# EAGLE board power_board (EAGLE 7.6.0)
DRAWING_TITLE: power_board; REVISION: 1.0
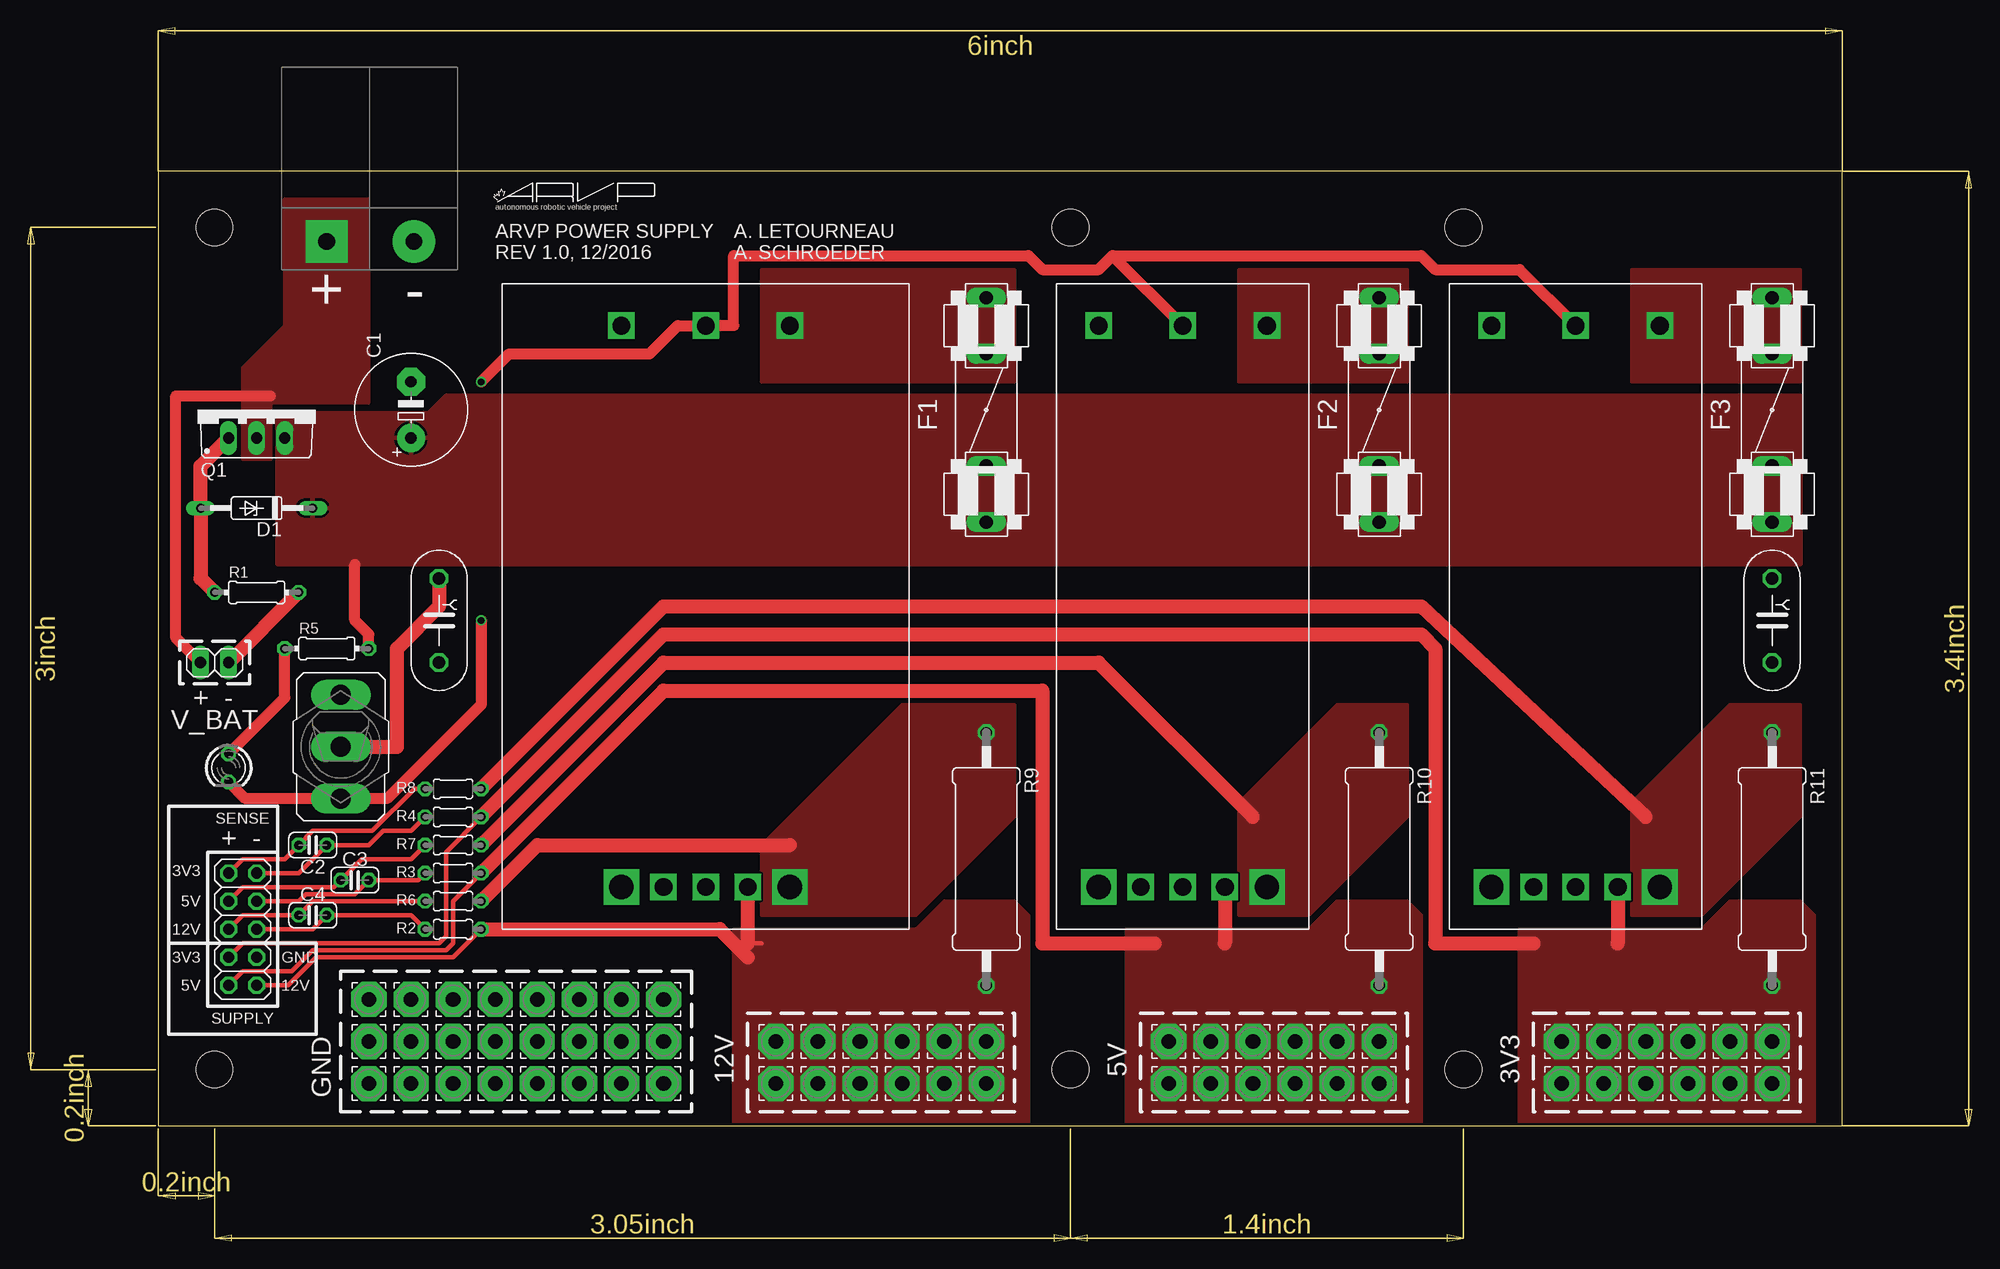
[diagram p0: board, top side]
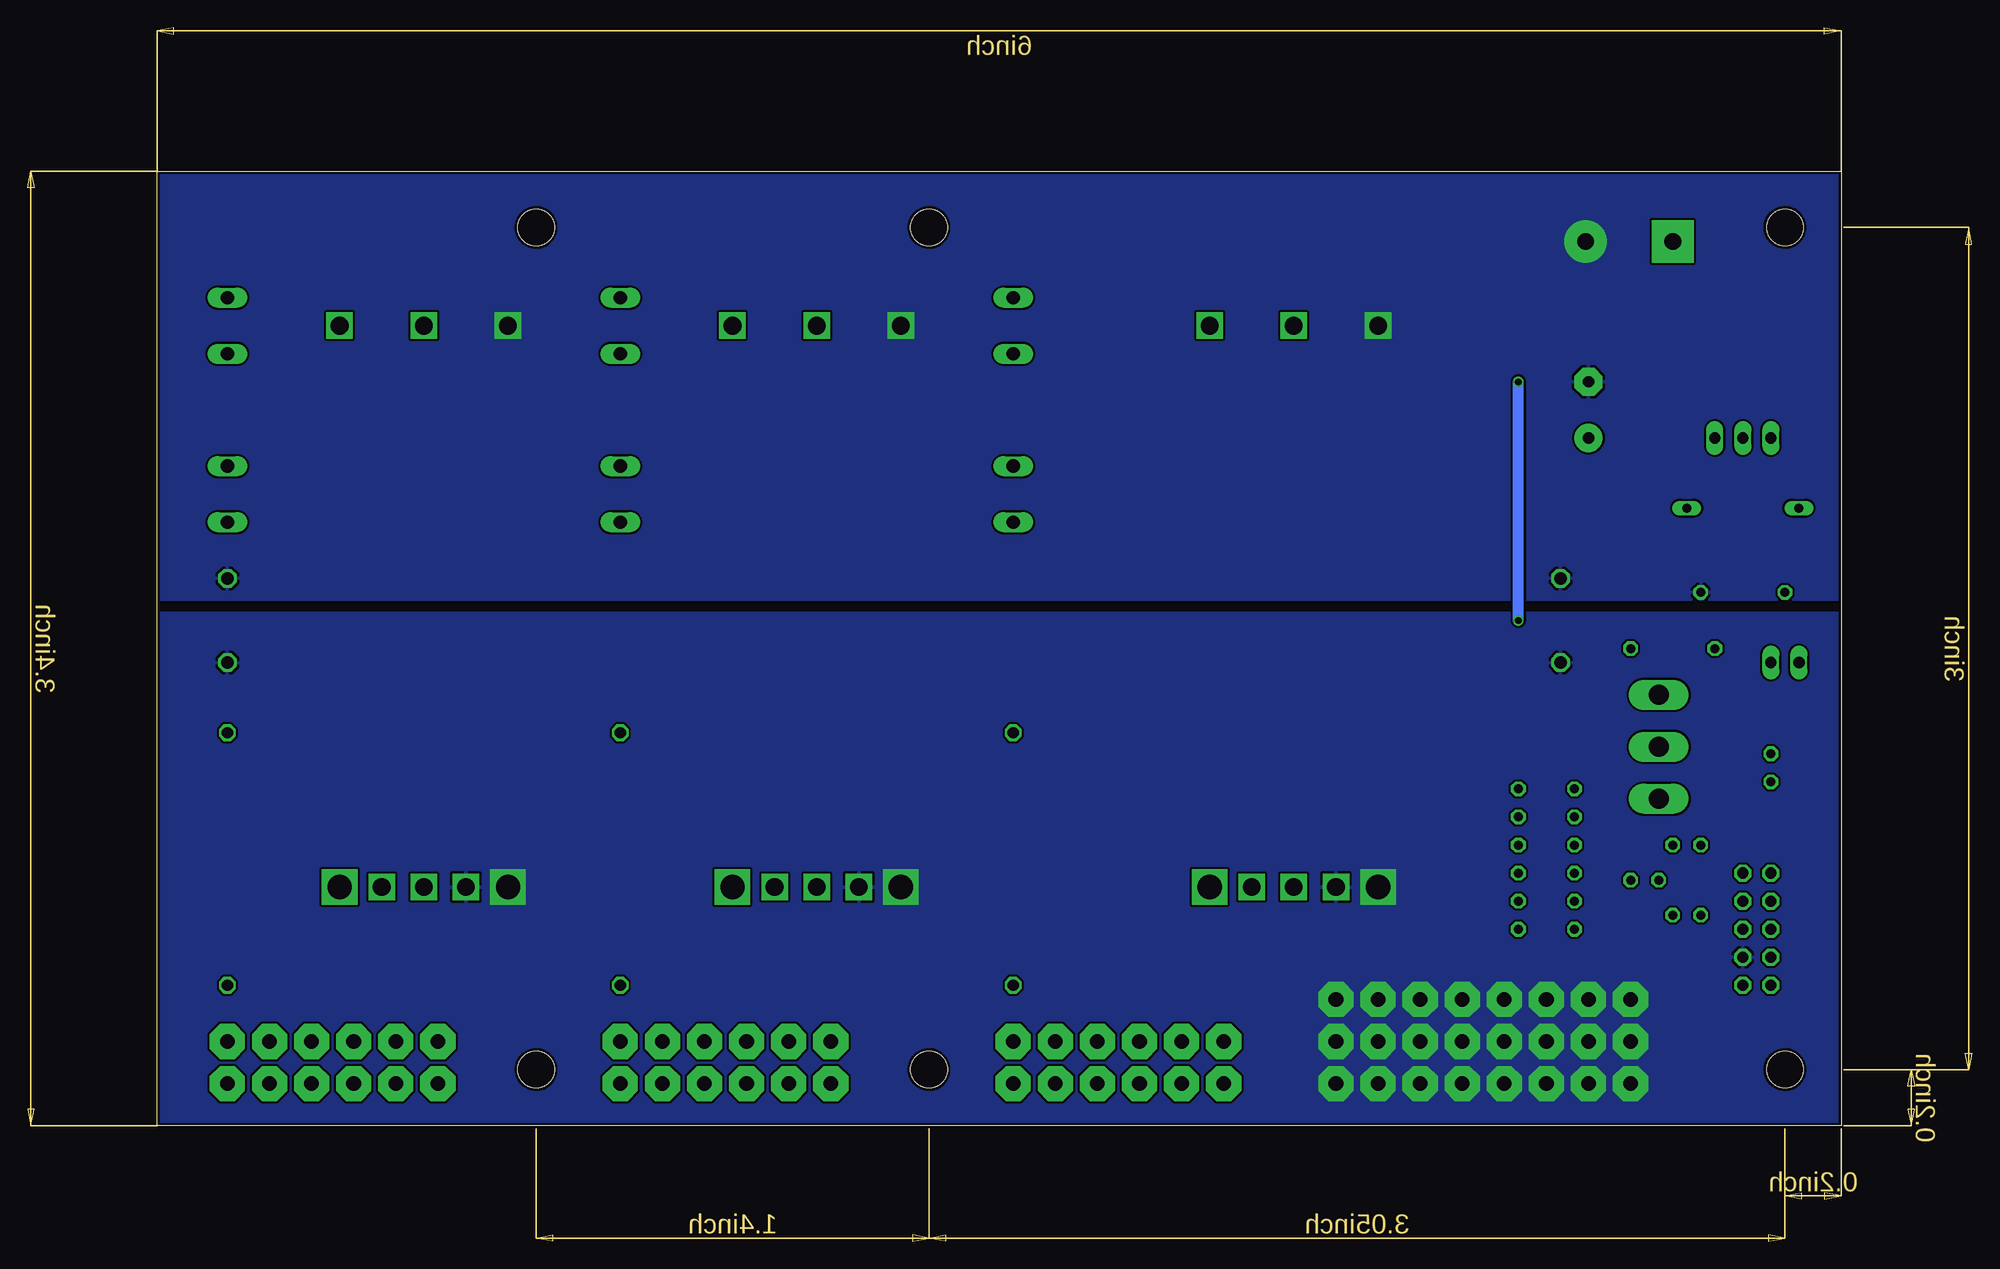
[diagram p1: board, bottom side, seen from below]

Size 152.4 x 86.36 mm. Coordinates in mm from the lower left corner, seen from the top.
Outline: 0,0 152.4,0 152.4,86.36 0,86.36 0,0
Copper layers (1*16): Top 0.035mm / dielectric 1.5mm / Bottom 0.035mm
Design rules "ITEADstudioDRC": minimum track width 6mil, minimum drill 12mil, track to track 6mil, track to pad 6mil, pad to pad 6mil, via to via 6mil, smd to smd 0mil, copper to edge 10mil, drill to drill 10mil, minimum pad ring 10mil, minimum via ring 6mil, stop-mask expansion 2mil, vias tented up to drill 100mil, thermal gap 10mil
Net classes: 0 default: clearance 0.205 mm

## Footprints (pad centres in the part's own frame; a part is rotated, then mirrored left to right if it is on the bottom)
E5-10,5 = drill 1.016 pad 2.54: + -2.54,0 | drill 1.016 pad 2.54 octagon: - 2.54,0
C025-024X044 = drill 0.813 octagon: 1 -1.27,0; 2 1.27,0
YC7B5 = drill 1.118 octagon: 1 -3.81,0; 2 3.81,0
DO35Z10 = drill 0.813 long: A 5.08,0; C -5.08,0
FUSE1 = drill 1.194 long: 1A -10.16,0; 1B -5.08,0; 2A 10.16,0; 2B 5.08,0
STAND-OFF = hole 3.302: 0,0
1X02 = drill 1.016 long: 1 -1.27,0; 2 1.27,0
2X05 = drill 1.016 octagon: 1 -5.08,-1.27; 2 -5.08,1.27; 3 -2.54,-1.27; 4 -2.54,1.27; 5 0,-1.27; 6 0,1.27; 7 2.54,-1.27; 8 2.54,1.27; 9 5.08,-1.27; 10 5.08,1.27
LED3MM = drill 0.813 octagon: A -1.27,0; K 1.27,0
AND_PWR = drill 1.524 pad 3.81: GND 0,-7.886 | drill 1.524 pad 3.81 square: PWR 0,0
3,17/1,3 = drill 1.321 pad 3.175 octagon: 1 0,0
TO220BV = drill 1.016 long: D 0,-2.54; G -2.54,-2.54; S 2.54,-2.54
0204/7 = drill 0.813 octagon: 1 -3.81,0; 2 3.81,0
0204/5 = drill 0.813 octagon: 1 -2.54,0; 2 2.54,0
0617/22 = drill 1.016 octagon: 1 -11.43,0; 2 11.43,0
M9040P = drill 1.803 long: 1 0,4.699; 2 0,0; 3 0,-4.699
UWQ-12/20-T48 = drill 1.6 square: +SENSE 25.4,3.81; +VIN -25.4,7.62; -SENSE 25.4,-3.81; -VIN -25.4,-7.62; RC -25.4,0; TRIM 25.4,0 | drill 2.2 square: +VOUT 25.4,7.62; -VOUT 25.4,-7.62
UWE-100-120W = drill 1.6 square: +SENSE 25.4,3.81; +VIN -25.4,7.62; -SENSE 25.4,-3.81; -VIN -25.4,-7.62; RC -25.4,0; TRIM 25.4,0 | drill 2.2 square: +VOUT 25.4,7.62; -VOUT 25.4,-7.62

## Placement (x,y rotation side)
C1  [E5-10,5]  22.86,64.77 90 top
C2  100n  [C025-024X044]  13.97,25.4 180 top
C3  100n  [C025-024X044]  17.78,22.23 180 top
C4  100n  [C025-024X044]  13.97,19.05 180 top
CY1  [YC7B5]  25.4,45.72 270 top
CY2  [YC7B5]  146.05,45.72 270 top
D1  [DO35Z10]  8.89,55.88 180 top
F1  [FUSE1]  74.93,64.77 90 top
F2  [FUSE1]  110.49,64.77 90 top
F3  [FUSE1]  146.05,64.77 90 top
JP1  STAND-OFF  [STAND-OFF]  82.55,5.08 0 top
JP2  STAND-OFF  [STAND-OFF]  118.11,5.08 0 top
JP3  STAND-OFF  [STAND-OFF]  118.11,81.28 0 top
JP4  STAND-OFF  [STAND-OFF]  5.08,5.08 0 top
JP5  STAND-OFF  [STAND-OFF]  5.08,81.28 0 top
JP6  STAND-OFF  [STAND-OFF]  82.55,81.28 0 top
JP7  [1X02]  5.08,41.91 0 top
JP8  [2X05]  7.62,17.78 90 top
LED1  [LED3MM]  6.35,32.39 270 top
P$1  AND_PWR  [AND_PWR]  15.24,80.01 90 top
PAD1  WIREPAD3,17/1,3  [3,17/1,3]  19.05,11.43 0 top
PAD2  WIREPAD3,17/1,3  [3,17/1,3]  22.86,11.43 0 top
PAD3  WIREPAD3,17/1,3  [3,17/1,3]  26.67,11.43 0 top
PAD4  WIREPAD3,17/1,3  [3,17/1,3]  30.48,11.43 0 top
PAD5  WIREPAD3,17/1,3  [3,17/1,3]  34.29,11.43 0 top
PAD6  WIREPAD3,17/1,3  [3,17/1,3]  38.1,11.43 0 top
PAD7  WIREPAD3,17/1,3  [3,17/1,3]  41.91,11.43 0 top
PAD8  WIREPAD3,17/1,3  [3,17/1,3]  45.72,11.43 0 top
PAD9  WIREPAD3,17/1,3  [3,17/1,3]  19.05,7.62 0 top
PAD10  WIREPAD3,17/1,3  [3,17/1,3]  22.86,7.62 0 top
PAD11  WIREPAD3,17/1,3  [3,17/1,3]  26.67,7.62 0 top
PAD12  WIREPAD3,17/1,3  [3,17/1,3]  30.48,7.62 0 top
PAD13  WIREPAD3,17/1,3  [3,17/1,3]  34.29,7.62 0 top
PAD14  WIREPAD3,17/1,3  [3,17/1,3]  38.1,7.62 0 top
PAD15  WIREPAD3,17/1,3  [3,17/1,3]  41.91,7.62 0 top
PAD16  WIREPAD3,17/1,3  [3,17/1,3]  45.72,7.62 0 top
PAD17  WIREPAD3,17/1,3  [3,17/1,3]  19.05,3.81 0 top
PAD18  WIREPAD3,17/1,3  [3,17/1,3]  22.86,3.81 0 top
PAD19  WIREPAD3,17/1,3  [3,17/1,3]  26.67,3.81 0 top
PAD20  WIREPAD3,17/1,3  [3,17/1,3]  30.48,3.81 0 top
PAD21  WIREPAD3,17/1,3  [3,17/1,3]  34.29,3.81 0 top
PAD22  WIREPAD3,17/1,3  [3,17/1,3]  38.1,3.81 0 top
PAD23  WIREPAD3,17/1,3  [3,17/1,3]  41.91,3.81 0 top
PAD24  WIREPAD3,17/1,3  [3,17/1,3]  45.72,3.81 0 top
PAD25  WIREPAD3,17/1,3  [3,17/1,3]  55.88,7.62 0 top
PAD26  WIREPAD3,17/1,3  [3,17/1,3]  59.69,7.62 0 top
PAD27  WIREPAD3,17/1,3  [3,17/1,3]  63.5,7.62 0 top
PAD28  WIREPAD3,17/1,3  [3,17/1,3]  74.93,7.62 0 top
PAD29  WIREPAD3,17/1,3  [3,17/1,3]  71.12,7.62 0 top
PAD30  WIREPAD3,17/1,3  [3,17/1,3]  67.31,7.62 0 top
PAD31  WIREPAD3,17/1,3  [3,17/1,3]  55.88,3.81 0 top
PAD32  WIREPAD3,17/1,3  [3,17/1,3]  59.69,3.81 0 top
PAD33  WIREPAD3,17/1,3  [3,17/1,3]  63.5,3.81 0 top
PAD34  WIREPAD3,17/1,3  [3,17/1,3]  67.31,3.81 0 top
PAD35  WIREPAD3,17/1,3  [3,17/1,3]  71.12,3.81 0 top
PAD36  WIREPAD3,17/1,3  [3,17/1,3]  74.93,3.81 0 top
PAD37  WIREPAD3,17/1,3  [3,17/1,3]  91.44,7.62 0 top
PAD38  WIREPAD3,17/1,3  [3,17/1,3]  95.25,7.62 0 top
PAD39  WIREPAD3,17/1,3  [3,17/1,3]  99.06,7.62 0 top
PAD40  WIREPAD3,17/1,3  [3,17/1,3]  110.49,7.62 0 top
PAD41  WIREPAD3,17/1,3  [3,17/1,3]  106.68,7.62 0 top
PAD42  WIREPAD3,17/1,3  [3,17/1,3]  102.87,7.62 0 top
PAD43  WIREPAD3,17/1,3  [3,17/1,3]  91.44,3.81 0 top
PAD44  WIREPAD3,17/1,3  [3,17/1,3]  95.25,3.81 0 top
PAD45  WIREPAD3,17/1,3  [3,17/1,3]  99.06,3.81 0 top
PAD46  WIREPAD3,17/1,3  [3,17/1,3]  110.49,3.81 0 top
PAD47  WIREPAD3,17/1,3  [3,17/1,3]  106.68,3.81 0 top
PAD48  WIREPAD3,17/1,3  [3,17/1,3]  102.87,3.81 0 top
PAD49  WIREPAD3,17/1,3  [3,17/1,3]  127,7.62 0 top
PAD50  WIREPAD3,17/1,3  [3,17/1,3]  130.81,7.62 0 top
PAD51  WIREPAD3,17/1,3  [3,17/1,3]  134.62,7.62 0 top
PAD52  WIREPAD3,17/1,3  [3,17/1,3]  138.43,7.62 0 top
PAD53  WIREPAD3,17/1,3  [3,17/1,3]  142.24,7.62 0 top
PAD54  WIREPAD3,17/1,3  [3,17/1,3]  146.05,7.62 0 top
PAD55  WIREPAD3,17/1,3  [3,17/1,3]  127,3.81 0 top
PAD56  WIREPAD3,17/1,3  [3,17/1,3]  130.81,3.81 0 top
PAD57  WIREPAD3,17/1,3  [3,17/1,3]  134.62,3.81 0 top
PAD58  WIREPAD3,17/1,3  [3,17/1,3]  138.43,3.81 0 top
PAD59  WIREPAD3,17/1,3  [3,17/1,3]  142.24,3.81 0 top
PAD60  WIREPAD3,17/1,3  [3,17/1,3]  146.05,3.81 0 top
Q1  IPP80P03P4L04AKSA1  [TO220BV]  8.89,64.77 0 top
R1  100k  [0204/7]  8.89,48.26 0 top
R2  10  [0204/5]  26.67,17.78 180 top
R3  10  [0204/5]  26.67,22.86 180 top
R4  10  [0204/5]  26.67,27.94 180 top
R5  1k  [0204/7]  15.24,43.18 0 top
R6  10  [0204/5]  26.67,20.32 0 top
R7  10  [0204/5]  26.67,25.4 0 top
R8  10  [0204/5]  26.67,30.48 0 top
R9  0.004  [0617/22]  74.93,24.13 270 top
R10  0.004  [0617/22]  110.49,24.13 270 top
R11  0.004  [0617/22]  146.05,24.13 270 top
S1  [M9040P]  16.51,34.29 180 top
U1  UWQ-12/20-T48NBS-C  [UWQ-12/20-T48]  49.53,46.99 270 top
U2  UWE-5/20-Q48NB-C  [UWE-100-120W]  92.71,46.99 270 top
U3  UWE-3.3/30-Q48NB-C  [UWE-100-120W]  128.27,46.99 270 top
U$1  [DINA5_L]  -59.69,-66.04 0 top  (outside the outline)
U$2  [DOCFIELD]  99.06,-62.23 0 top  (outside the outline)
U$3  [ARVP]  30.48,82.87 0 top

## Library data of the parts
C1-C4 CY1 CY2 R2-R4 R6-R11 = rcl
D1 = diode
F1-F3 = special
JP1-JP6 = SparkFun
JP7 JP8 = pinhead
LED1 = led
P$1 U$3 = ARVP
PAD1-PAD60 = wirepad
Q1 = transistor-power
R1 R5 = resistor
S1 = switch
U1-U3 = New Power Board Library
U$1 U$2 = frames

## Nets
3V3+SENSE: R8.2 R11.1 U3.+VOUT
3V3-SENSE: JP8.4 PAD49.1 PAD50.1 PAD51.1 PAD52.1 PAD53.1 PAD54.1 PAD55.1 PAD56.1 PAD57.1 PAD58.1 PAD59.1 PAD60.1 R4.1 R11.2 U3.+SENSE
5V+SENSE: R7.2 R10.1 U2.+VOUT
5V-SENSE: JP8.2 PAD37.1 PAD38.1 PAD39.1 PAD40.1 PAD41.1 PAD42.1 PAD43.1 PAD44.1 PAD45.1 PAD46.1 PAD47.1 PAD48.1 R3.1 R10.2 U2.+SENSE
12V+SENSE: R6.2 R9.1 U1.+VOUT
12V-SENSE: JP8.1 PAD25.1 PAD26.1 PAD27.1 PAD28.1 PAD29.1 PAD30.1 PAD31.1 PAD32.1 PAD33.1 PAD34.1 PAD35.1 PAD36.1 R2.1 R9.2 U1.+SENSE
GND: CY1.2 CY2.2 JP8.3 PAD1.1 PAD2.1 PAD3.1 PAD4.1 PAD5.1 PAD6.1 PAD7.1 PAD8.1 PAD9.1 PAD10.1 PAD11.1 PAD12.1 PAD13.1 PAD14.1 PAD15.1 PAD16.1 PAD17.1 PAD18.1 PAD19.1 PAD20.1 PAD21.1 PAD22.1 PAD23.1 PAD24.1 U1.-SENSE U1.-VOUT U2.-SENSE U2.-VOUT U3.-SENSE U3.-VOUT
J3: C4.1 JP8.5 R2.2
J4: C4.2 JP8.6 R6.1
J5: C3.1 JP8.7 R3.2
J6: C3.2 JP8.8 R7.1
J7: C2.1 JP8.9 R4.2
J8: C2.2 JP8.10 R8.1
N$1: LED1.A R5.1
N$4: D1.A Q1.G R1.1
N$5: F1.2A F1.2B U1.+VIN
N$6: F2.2A F2.2B U2.+VIN
N$7: F3.2A F3.2B U3.+VIN
ON/OFF: LED1.K S1.1 U1.RC U2.RC U3.RC
V+: C1.+ D1.C F1.1A F1.1B F2.1A F2.1B F3.1A F3.1B Q1.S R5.2
V-: C1.- CY1.1 CY2.1 JP7.2 P$1.GND R1.2 S1.2 U1.-VIN U2.-VIN U3.-VIN
VBAT+: JP7.1 P$1.PWR Q1.D

## Tracks (layer width: path | path; a pad name or v marks a point on that pad's centre or on a via)
3V3+SENSE
  Top 1.27: R8.2 45.72,46.99 114.3,46.99 134.62,27.94
  pour Top (no thermals): 148.59,38.1 142.24,38.1 133.35,29.21 133.35,19.05 139.7,19.05 148.59,27.94
3V3-SENSE
  Top 0.406: R4.1 26.03,24.77 26.03,17.15 25.4,16.51 7.62,16.51 JP8.4
  Top 1.27: U3.+SENSE 132.08,16.51 | R4.1 45.72,44.45 114.3,44.45 115.57,43.18 115.57,16.51 124.46,16.51
  pour Top (no thermals): 148.59,20.32 149.86,19.05 149.86,0 123.19,0 123.19,17.78 139.7,17.78 142.24,20.32
5V+SENSE
  Top 1.27: R7.2 45.72,41.91 85.09,41.91 99.06,27.94
  pour Top (no thermals): 97.79,19.05 97.79,29.21 106.68,38.1 113.03,38.1 113.03,27.94 104.14,19.05
5V-SENSE
  Top 0.406: R3.1 26.67,20.32 26.67,16.51 26.03,15.88 13.97,15.88 12.06,13.97 7.62,13.97 JP8.2
  Top 1.27: U2.+SENSE 96.52,16.51 | R3.1 45.72,39.37 80.01,39.37 80.01,16.51 90.17,16.51
  pour Top (no thermals): 113.03,20.32 106.68,20.32 104.14,17.78 87.63,17.78 87.63,0 114.3,0 114.3,19.05
12V+SENSE
  Top 1.27: R6.2 34.29,25.4 57.15,25.4
  pour Top (no thermals): 54.61,19.05 68.58,19.05 77.47,27.94 77.47,38.1 67.31,38.1 54.61,25.4
12V-SENSE
  Top 0.406: 53.34,16.51 54.61,16.51 | R2.1 26.67,15.24 14.29,15.24 11.75,12.7 JP8.1
  Top 1.27: U1.+SENSE 53.34,16.51 | R2.1 50.8,17.78 53.34,15.24
  pour Top (no thermals): 77.47,20.32 71.12,20.32 68.58,17.78 52.07,17.78 52.07,0 78.74,0 78.74,19.05
GND
  pour Bottom: 152.4,46.36 152.4,0 -1.27,0 -1.27,46.36
  pour Bottom (no thermals): 39.37,24.13 39.37,19.05 44.13,19.05 44.13,24.13
  pour Bottom (no thermals): 82.55,24.13 82.55,19.05 87.31,19.05 87.31,24.13
  pour Bottom (no thermals): 118.11,24.13 118.11,19.05 122.87,19.05 122.87,24.13
  pour Bottom (no thermals): 16.51,13.97 16.51,1.27 48.26,1.27 48.26,13.97
J3
  Top 0.406: R2.2 22.86,19.05 C4.1 13.97,17.78 JP8.5
J4
  Top 0.406: R6.1 13.97,20.32 C4.2 7.62,19.05 JP8.6
J5
  Top 0.406: R3.2 23.49,22.23 C3.1 17.78,20.95 13.34,20.95 12.7,20.32 JP8.7
J6
  Top 0.406: JP8.8 7.62,21.59 15.88,21.59 C3.2 18.41,24.13 22.86,24.13 R7.1
J7
  Top 0.406: R4.2 22.86,26.67 20.32,26.67 19.05,25.4 C2.1 12.7,22.86 JP8.9
J8
  Top 0.406: JP8.10 7.62,24.13 11.43,24.13 C2.2 13.97,26.67 19.37,26.67 23.18,30.48 R8.1
N$1
  Top 1: LED1.A 11.43,38.73 R5.1
N$4
  Top 1.27: Q1.G 3.81,59.69 D1.A 3.81,49.53 R1.1
N$5
  pour Top (no thermals): 77.47,67.31 77.47,77.47 54.61,77.47 54.61,67.31
N$6
  pour Top (no thermals): 113.03,77.47 97.79,77.47 97.79,67.31 113.03,67.31
N$7
  pour Top (no thermals): 148.59,77.47 133.35,77.47 133.35,67.31 148.59,67.31
ON/OFF  (via drill 0.6)
  Top 1: v29.21,67.31 31.75,69.85 44.45,69.85 46.99,72.39 U1.RC 52.07,72.39 52.07,78.74 78.74,78.74 80.01,77.47 85.09,77.47 86.36,78.74 | v29.21,45.72 29.21,38.1 20.7,29.59 S1.1 7.87,29.59 LED1.K | 86.36,78.74 114.3,78.74 115.57,77.47 123.19,77.47 U3.RC | 86.36,78.74 U2.RC
  Bottom 1: v29.21,45.72 v29.21,67.31
V+
  Top 1: R5.2 19.05,44.45 17.78,45.72 17.78,50.8
  pour Top: 10.8,64.45 24.45,64.45 26.03,66.04 148.59,66.04 148.59,50.8 10.8,50.8
  pour Top (no thermals): 13.97,64.45 13.97,59.69 10.8,59.69 10.8,64.13 11.11,64.45
  pour Top (no thermals): 69.85,62.23 69.85,52.07 148.59,52.07 148.59,62.23
V-
  Top 1.27: S1.2 21.59,34.29 21.59,43.18 25.4,46.99 CY1.1 | JP7.2 R1.2
  pour Bottom: 0,86.36 152.4,86.36 152.72,47.62 0,47.62
  pour Bottom (no thermals): 118.11,74.93 118.11,69.85 123.19,69.85 123.19,74.93
  pour Bottom (no thermals): 82.55,74.93 82.55,69.85 87.63,69.85 87.63,74.93
  pour Bottom (no thermals): 39.37,74.93 39.37,69.85 44.45,69.85 44.45,74.93
  pour Bottom (no thermals): 20.32,82.55 26.67,82.55 26.67,77.47 20.32,77.47
VBAT+
  Top 1: JP7.1 1.59,44.13 1.59,66.04 10.16,66.04
  pour Top (no thermals): 11.43,83.82 11.43,72.39 7.62,68.58 7.62,60.33 10.16,60.33 10.16,65.41 19.05,65.41 19.05,83.82

## Text on the board
tNames: ARVP POWER SUPPLY | A. LETOURNEAU | REV 1.0, 12/2016 | A. SCHROEDER | + | - | + | - | V_BAT | SENSE | + | - | 3V3 | 5V | 12V | 3V3 | GND | 5V | 12V | SUPPLY | 5V | 12V | 3V3 | GND